# Altium PCB esp32_radio_pcb.PcbDoc
Units mil, origin at the board's own origin, x right, y up, seen from the top; angles counter-clockwise.
Board outline 5274 x 3102 mil, 2 copper layers (Top Layer, Bottom Layer); 38 components, 33 nets, 127 pads, 5 vias.
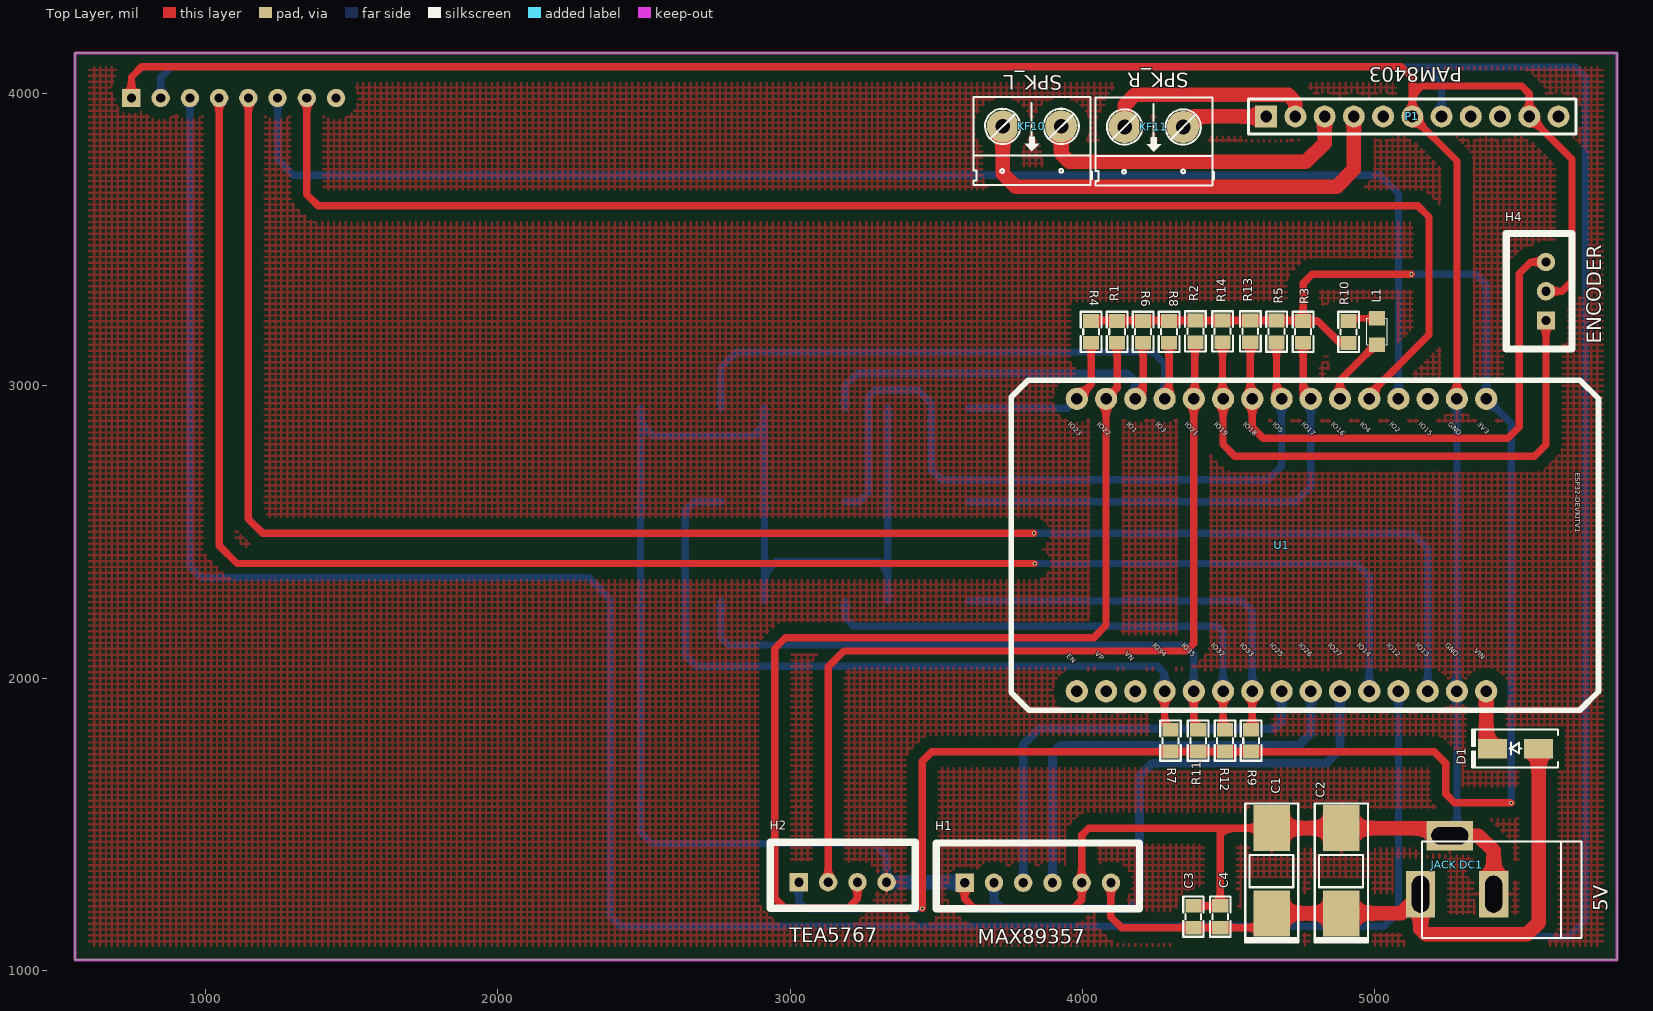
[diagram p0: Top Layer view]
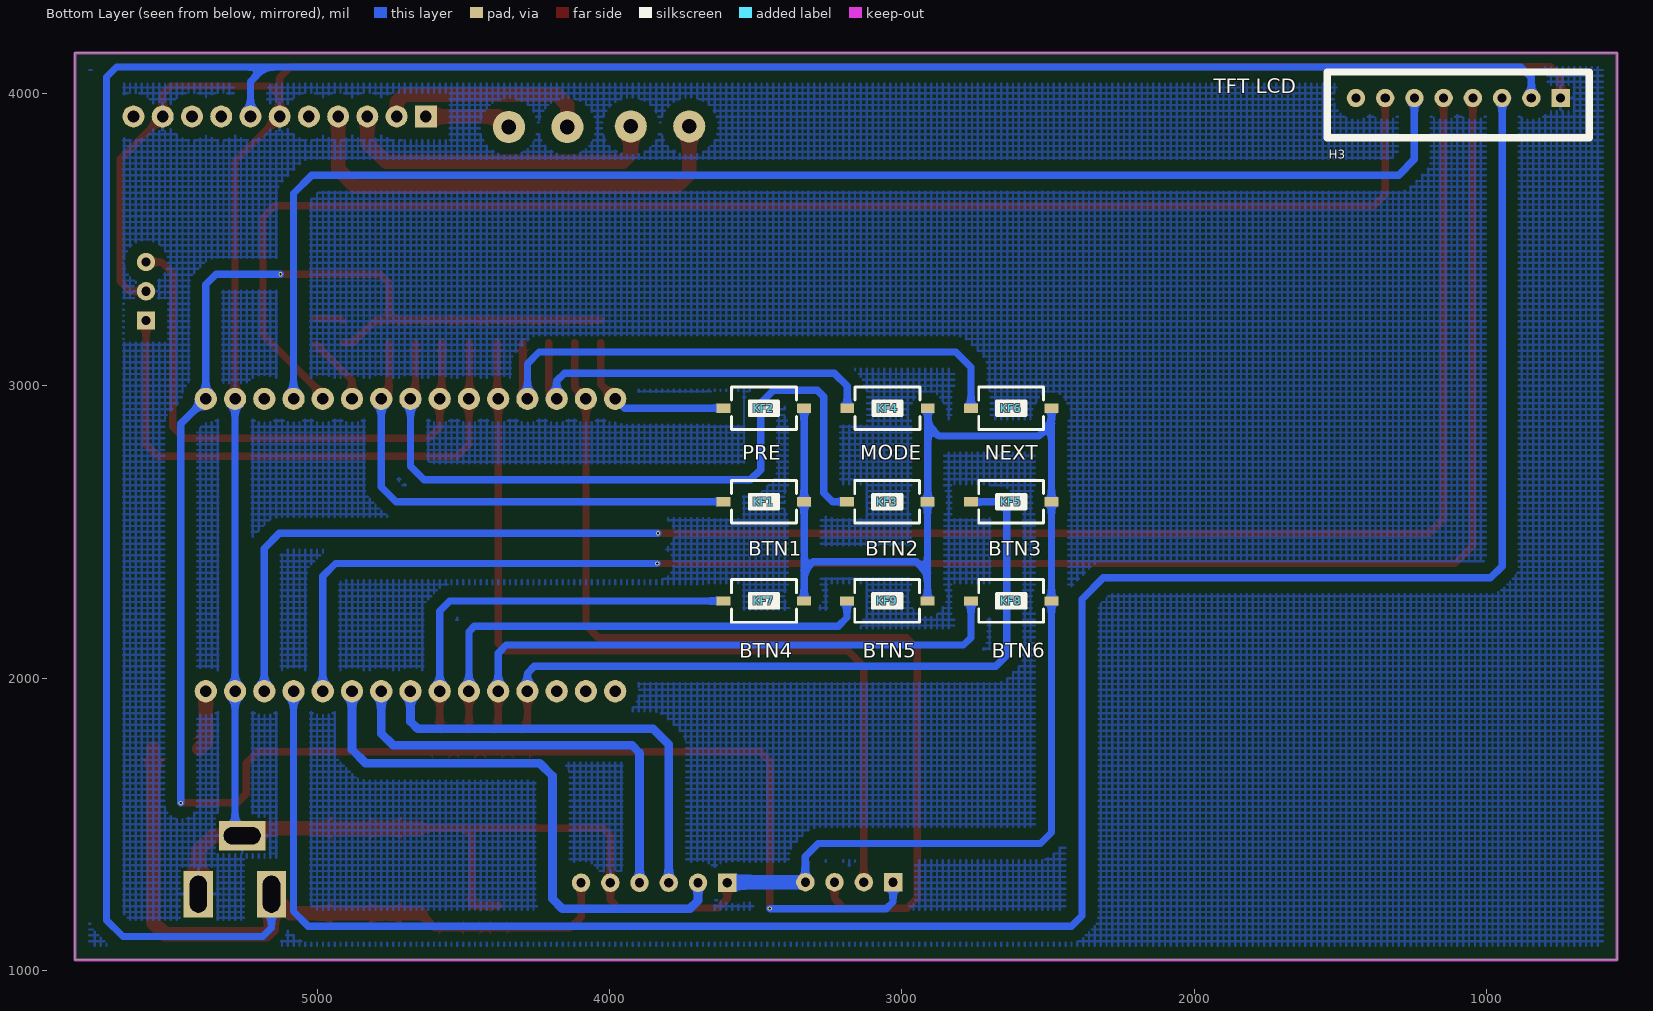
[diagram p1: Bottom Layer view, seen from below]
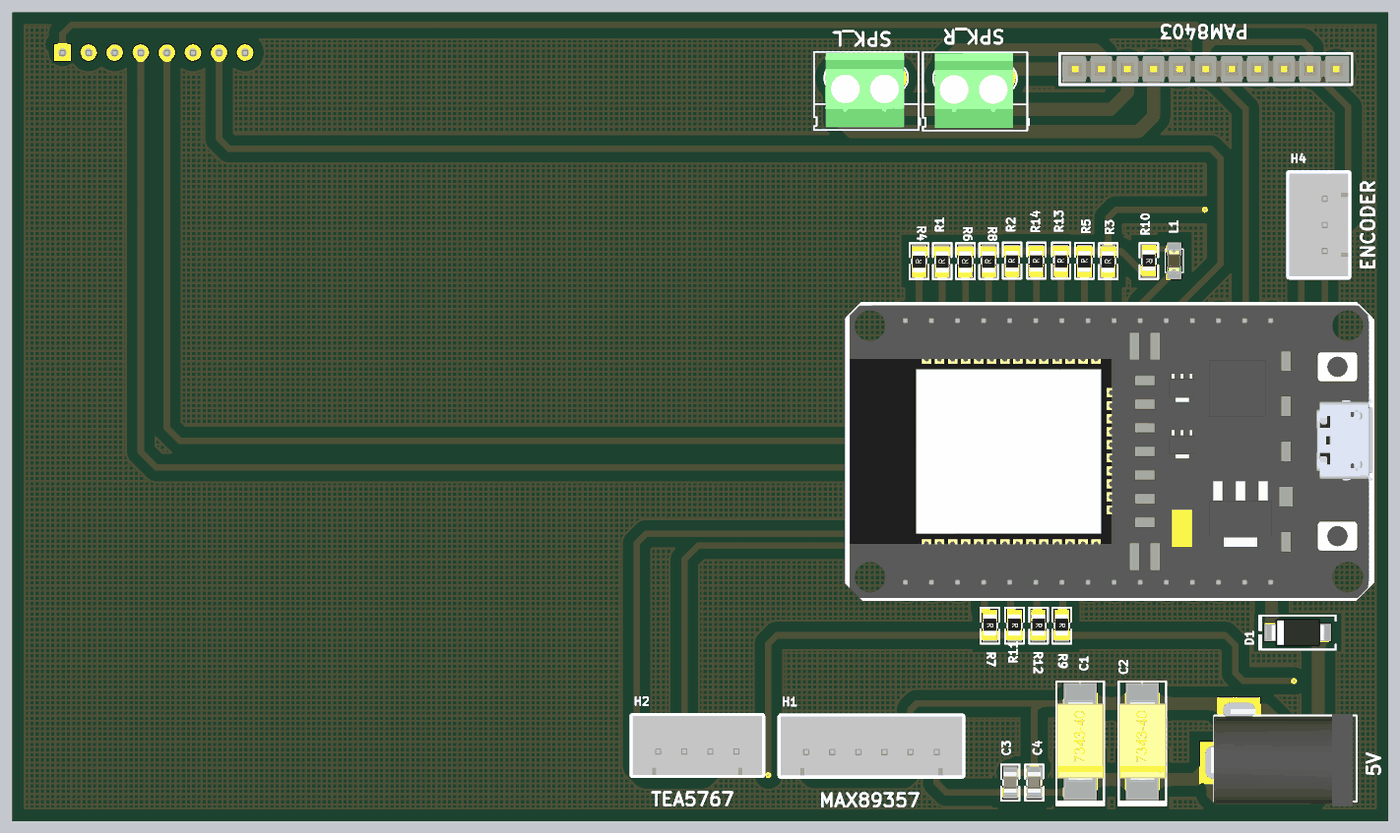
[diagram p2: 3D render of the assembled board from above, using the file's embedded part models]
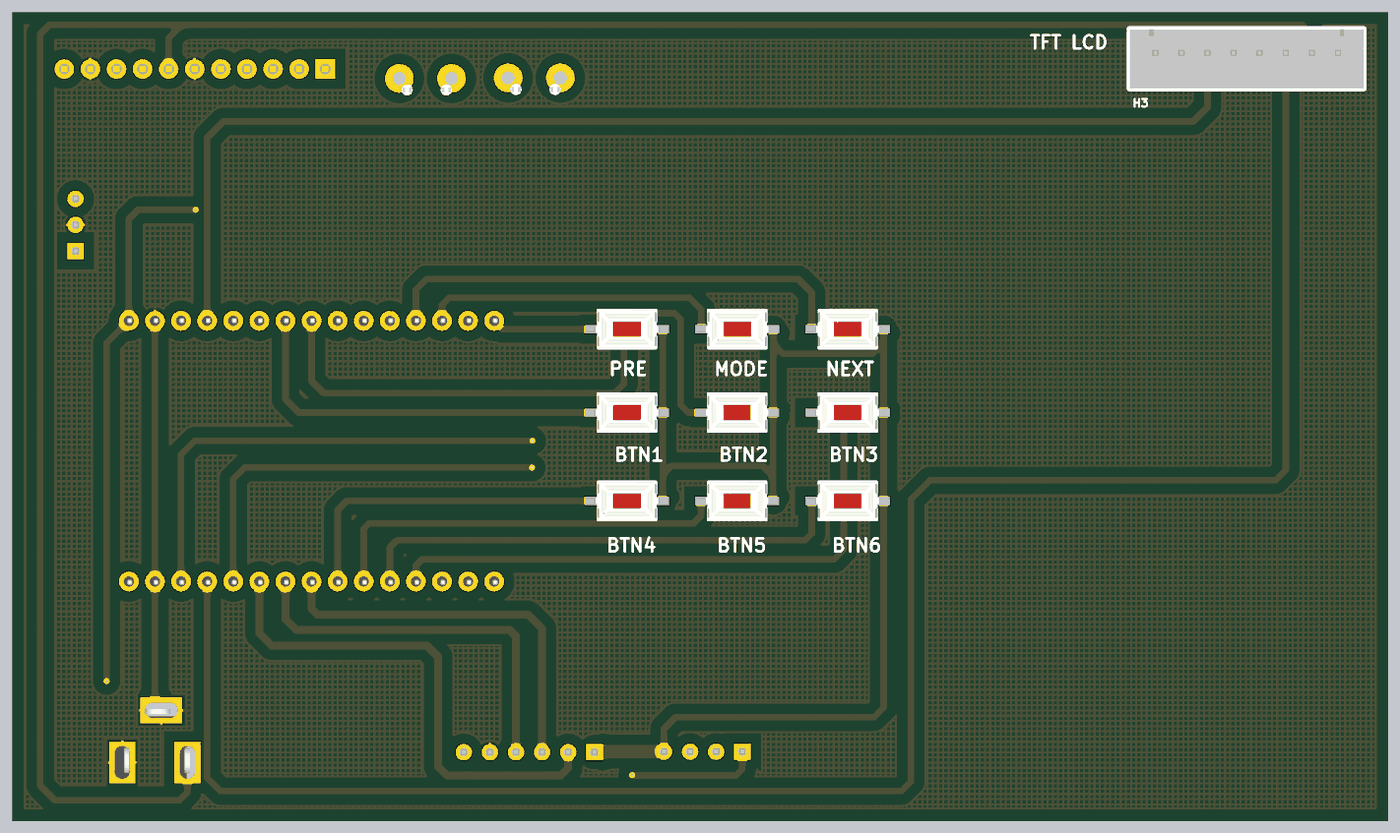
[diagram p3: 3D render of the assembled board from below, using the file's embedded part models]

## Layer stack, top to bottom
Top Solder: solder mask 0.4, Solder Resist, Dk 3.5
Top Layer: signal copper 1.4
Dielectric 1: dielectric 12.6, FR-4, Dk 4.8
Bottom Layer: signal copper 1.4
Bottom Solder: solder mask 0.4, Solder Resist, Dk 3.5

## Board outline
554,1036 5828,1036 5828,4138 554,4138

## Design rules (kind name [scope] priority, off if disabled: settings)
Clearance [All] p1: gap=40
PolygonConnect [All] p1: connectstyle=Relief reliefconductorwidth=10 reliefentries=4 polygonreliefangle="90 Angle" airgapwidth=10
RoutingVias [All] p1: holewidth=8 width=15 viastyle="Through Hole" minholewidth=8 minwidth=15 maxholewidth=8 maxwidth=15
SolderMaskExpansion [All] p1: expansion=4
Width [All] p1: maxlimit=50 minlimit=10 preferedwidth=25
30 further rules are at their usual default settings.

## Components (designator, comment, footprint, x,y, rotation, side; value= is the part's Value field where it differs from the comment)
C1 "470uF" "tu tantalum smd7343" 4647,1341 r90 top
C2 "470uF" "tu tantalum smd7343" 4885,1341 r90 top
C3 "10pF" "tu 0805" 4379,1184 r270 top
C4 "10pF" "tu 0805" 4471,1184 r270 top
D1 "M7" "DIODE SMA" 5481,1759 r180 top
H1 "Header 6P 2.54 Duc Thang" XH2.54M-6 3597,1300 r0 top
H2 "Header 4P 2.54 Duc Thang" XH2.54M-4 3030,1302 r0 top
H3 "Header 8P 2.54 Duc Thang" XH2.54M-8 747,3984 r0 bottom
H4 "Header 3P 2.54 Duc Thang" XH2.54M-3 5585,3223 r90 top
"JACK DC1" "JACK DC 5.5" "JACK DC 5.5" 5281,1361 r180 top
KF1 "CON 2 KF301" "Nut Nhan 2 Chan SMD 3x6x2.5" 3472,2603 r180 bottom
KF2 "CON 2 KF301" "Nut Nhan 2 Chan SMD 3x6x2.5" 3472.02,2923 r180 bottom
KF3 "CON 2 KF301" "Nut Nhan 2 Chan SMD 3x6x2.5" 3050,2603 r180 bottom
KF4 "CON 2 KF301" "Nut Nhan 2 Chan SMD 3x6x2.5" 3049.01,2923 r180 bottom
KF5 "CON 2 KF301" "Nut Nhan 2 Chan SMD 3x6x2.5" 2626,2603 r180 bottom
KF6 "CON 2 KF301" "Nut Nhan 2 Chan SMD 3x6x2.5" 2626,2923 r180 bottom
KF7 "CON 2 KF301" "Nut Nhan 2 Chan SMD 3x6x2.5" 3472,2264 r180 bottom
KF8 "CON 2 KF301" "Nut Nhan 2 Chan SMD 3x6x2.5" 2626,2264 r180 bottom
KF9 "CON 2 KF301" "Nut Nhan 2 Chan SMD 3x6x2.5" 3050,2264 r180 bottom
KF10 "CON 2 KF301" "Con 2 KF301 5.08" 3927,3887 r180 top
KF11 "CON 2 KF301" "Con 2 KF301 5.08" 4344.01,3885 r180 top
L1 "LED 0805" LED-0805-Red 5006.95,3140.17 r90 top
P1 "Header 11" "Header 11" 4628,3921 r0 top
R1 "10K" "tro smd 0805" 4115.88,3184 r90 top
R2 "10K" "tro smd 0805" 4383.54,3186 r90 top
R3 "10k" "tro smd 0805" 4752,3184 r90 top
R4 "10k" "tro smd 0805" 4027,3184 r90 top
R5 "10k" "tro smd 0805" 4661,3185 r90 top
R6 "10k" "tro smd 0805" 4204.77,3184 r90 top
R7 "10k" "tro smd 0805" 4303.39,1786 r270 top
R8 "10k" "tro smd 0805" 4293.65,3184 r90 top
R9 "10k" "tro smd 0805" 4579,1786 r270 top
R10 "10k" "tro smd 0805" 4912.31,3184 r270 top
R11 "10k" "tro smd 0805" 4398,1786 r270 top
R12 "10k" "tro smd 0805" 4489.8,1786 r270 top
R13 "10k" "tro smd 0805" 4571.21,3186 r90 top
R14 "10k" "tro smd 0805" 4476.51,3186 r90 top
U1 "ESP32-DEVKITC-32D" MODULE_ESP32-DEVKITV1 4790,2455 r270 top

## Footprints (in the part's own frame and the unit in brackets; to place one, negate y for a bottom-side part, rotate by r counter-clockwise, add the part's x,y. Pads: shape width x height; smd on the part's side, far side on the other; paste and mask are expansions set on the pad)
"Con 2 KF301 5.08" [mil]
  round 110 hole 50: 1(0,0) 2(200,0)
  silkscreen extent -106,-100 300,200, body extent -45,-97 255,190, height 335
"DIODE SMA" [mm] "SMA"
  rect 2.5x1.7 smd: 1(-2,0) 2(2,0)
  silkscreen extent -3.68,-1.65 3.75,1.65, body extent -2.6,-1.37 2.6,1.37, height 2.4
"Header 11" [mil] "Connector; Header; 11 Position; Solder Pad 35mil"
  rect 75x75 hole 40: 1(0,0)
  round 75 hole 40: 2(100,0) 3(200,0) 4(300,0) 5(400,0) 6(500,0) 7(600,0) 8(700,0) 9(800,0) 10(900,0) 11(1000,0)
  silkscreen extent -60,-60 1060,60, body extent -50,-50 1050,50, height 330
"JACK DC 5.5" [mil] "Jac DC input"
  rect 100x160 hole 59.06 slot 125.98 at 90 deg: 1(125,100) 2(-125,100)
  rect 160x100 hole 59.06 slot 125.98 at 0 deg: 3(25,-100)
  silkscreen extent -425,-80 120,250, body extent -410,-105 134,269, height 434
LED-0805-Red [mil]
  rect 50x55 smd: 1(0,0) 2(90,0)
  silkscreen extent 0,-35 90,35, body extent 5,-25 85,25, height 43
MODULE_ESP32-DEVKITV1 [mil]
  round 76 / inner round 60 / far side round 76 hole 39.37: 1(-500,590.55) 2(-500,490.55) 3(-500,390.55) 4(-500,290.55) 5(-500,190.55) 6(-500,90.55) 7(-500,-9.45) 8(-500,-109.45) 9(-500,-209.45) 10(-500,-309.45) 11(-500,-409.45) 12(-500,-509.45) 13(-500,-609.45) 14(-500,-709.45) 15(-500,-809.45) 16(500,-809.45) 17(500,-709.45) 18(500,-609.45) 19(500,-509.45) 20(500,-409.45) 21(500,-309.45) 22(500,-209.45) 23(500,-109.45) 24(500,-9.45) 25(500,90.55) 26(500,190.55) 27(500,290.55) 28(500,390.55) 29(500,490.55) 30(500,590.55)
  silkscreen extent -563,-1034 565,974, body extent -560,-1027 562,978, height 283
"Nut Nhan 2 Chan SMD 3x6x2.5" [mm] "Switch SMD type"
  rect 1.2x0.8 smd: 1(-3.5,0) 2(3.5,0)
  silkscreen extent -2.82,-1.85 2.82,1.85, body extent -3.05,-1.85 3.05,1.85, height 2.5
"tro smd 0805" [mm]
  rect 1.2x1.4 smd: 1(-0.946,-0.061) 2(0.954,-0.061)
  silkscreen extent -1.75,-0.97 1.75,0.84, body extent -1.56,-0.76 1.44,0.64, height 0.53
"tu 0805" [mm] "Compoment SMD 80x50mil"
  rect 1.2x1.4 smd: 1(-0.946,-0.003) 2(0.954,-0.003)
  silkscreen extent -1.75,-0.89 1.75,0.89, body extent -1.01,-0.64 1.01,0.63, height 0.61
"tu tantalum smd7343" [mm]
  rect 4x3.2 smd: 1(-3.7,0) 2(3.7,0)
  silkscreen extent -6.23,-2.31 5.85,2.31, body extent -3.75,-2.33 3.85,2.27, height 3.99
XH2.54M-3 [mm]
  rect 1.6x1.6 hole 0.8: 1(0,0)
  round 1.6 hole 0.8: 2(2.54,0) 3(5.08,0)
  silkscreen extent -2.48,-2.26 7.56,3.46, body extent -2.48,-2.26 7.56,3.48, height 6.91
XH2.54M-4 [mm]
  rect 1.6x1.6 hole 0.8: 1(0,0)
  round 1.6 hole 0.8: 2(2.54,0) 3(5.08,0) 4(7.62,0)
  silkscreen extent -2.48,-2.26 10.1,3.46, body extent -2.48,-2.26 10.1,3.48, height 6.91
XH2.54M-6 [mm]
  rect 1.6x1.6 hole 0.8: 1(0,0)
  round 1.6 hole 0.8: 2(2.54,0) 3(5.08,0) 4(7.62,0) 5(10.16,0) 6(12.7,0)
  silkscreen extent -2.48,-2.26 15.18,3.46, body extent -2.48,-2.26 15.18,3.48, height 6.91
XH2.54M-8 [mm]
  rect 1.6x1.6 hole 0.8: 1(0,0)
  round 1.6 hole 0.8: 2(2.54,0) 3(5.08,0) 4(7.62,0) 5(10.16,0) 6(12.7,0) 7(15.24,0) 8(17.78,0)
  silkscreen extent -2.48,-2.26 20.26,3.46, body extent -2.48,-2.26 20.26,3.48, height 6.91

## Part data
C1 C2: library part "Tu tantalum 470uF 10V SMD7343", "Dán"
C3 C4: library part "Tu 0805 10pF 50V 10%", "Dán"
D1: library part "Diode M7 ( 4007 )", "Dán"
H1 H2 H3 H4 KF1 KF2 KF3 KF4 KF5 KF6 KF7 KF8 KF9 KF10 KF11: "C?m"
L1: library part "LED 0805 Do", "Dán"
P1: "Header, 11-Pin"
R1 R2 R3 R4 R5 R6 R7 R8 R9 R10 R11 R12 R13 R14: library part "Tro 0805 1% 1k", "Dán"
U1: "Eval Board For Esp-Wroom-32"

## Via types
v1: diameter 15, hole 8, Top Layer to Bottom Layer, 5 vias

## Nets (pads, with @x,y where several pads share a name; then routed paths per layer and width w, separated by ;. In a path a pad name is that pad's centre, name@x,y a point inside that pad or via, vN(x,y) a via of type N, cw(c..) or ccw(c..) an arc to the next point about the centre after c; other vN are vias at no path point)
+3V3: H2.1 R1.2 R2.2 R3.2 R4.2 R5.2 R6.2 R7.2 R8.2 R9.2 R10.2 R11.2 R12.2 R13.2 R14.2 U1.1 | length 6668.4
  Top Layer w25: v1(3452,1212) 3452,1716 3484.43,1748.43 R7.2 R11.2 R12.2 R9.2 5202.57,1748.43 5242,1709 5242,1604 5272,1574 5465,1574 v1(5466,1573) ; R4.2@4030,3224 4030.43,3223.57 R2.2 R14.2 R13.2 4752.39,3223.57 R3.2 ; R10.2 4879.57,3146.43 4804.43,3221.57 R3.2 ; v1(5125,3381) 4785,3381 4754.39,3350.39 R3.2
  Bottom Layer w25: H2.1 3030,1234 3053,1211 3451,1211 v1(3452,1212) ; v1(5125,3381) 5346,3381 5380.55,3346.45 U1.1 5466,2869.55 v1(5466,1573)
+5V: "JACK DC1.1" C1.1 C2.1 C3.2 C4.2 D1.1 H1.6 H3.2 P1.7 | length 11140.9
  Top Layer w25: H1.6 4097,1183 4133.57,1146.43 C3.2 C4.2 4598.09,1146.43 C1.1
  Top Layer w50: C1.1 C2.1 5090.33,1195.33 5156,1261 5156,1142 5174,1124 5520,1124 5559.74,1163.74 D1.1
  Bottom Layer w25: H3.2 847,4054 883,4090 5178,4090 ; 5156,1261 5156,1146 5186,1116 5664,1116 5720,1172 5720,4056 5686,4090 5178,4090 ; P1.7 5228,4040 5178,4090
BCK: H1.2 U1.25 | length 1927.2
  Bottom Layer w30: H1.2 3697,1239 3725,1211 4161,1211 4195,1245 4195,1665 4239,1709 4834,1709 4880.55,1755.55 U1.25
BTN_1: KF1.1 R3.1 U1.7 | length 1695.8
  Top Layer w25: R3.1 4754.39,2981.16 U1.7
  Bottom Layer w25: KF1.1 4730,2603 4780.55,2653.55 U1.7
BTN_2: KF3.1 R5.1 U1.8 | length 2552.6
  Top Layer w25: R5.1 4663.39,2972.16 U1.8
  Bottom Layer w25: KF3.1 3237,2603 3267,2633 3267,2962 3289,2984 3439,2984 3483,2940 3483,2713 3518,2678 4634,2678 4680.55,2724.55 U1.8
BTN_3: KF5.1 R7.1 U1.19 | length 2497
  Top Layer w25: U1.19 4280.55,1843.68 R7.1
  Bottom Layer w25: KF5.1 2671,2603 2641,2573 2641,2078 2679,2040 4257,2040 4280.55,2016.45 U1.19
BTN_4: KF7.1 R9.1 U1.22 | length 1392.9
  Top Layer w25: R9.1 4580.55,1827.17 U1.22
  Bottom Layer w25: KF7.1 4546,2264 4580.55,2229.45 U1.22
BTN_5: KF9.1 R12.1 U1.21 | length 1707.8
  Top Layer w25: U1.21 4480.55,1830.08 R12.1
  Bottom Layer w25: KF9.1 3187.8,2207.2 3218,2177 4462,2177 4480.55,2158.45 U1.21
BTN_6: KF8.1 R11.1 U1.20 | length 2032.9
  Top Layer w25: U1.20 4380.55,1838.28 R11.1
  Bottom Layer w25: KF8.1 2763.8,2138.2 2789,2113 4353,2113 4380.55,2085.45 U1.20
BTN_MODE: KF4.1 R6.1 U1.13 | length 1363.1
  Top Layer w25: U1.13 4207.16,2981.61 R6.1
  Bottom Layer w25: KF4.1 3186.81,2998.81 3231,3043 4154,3043 4180.55,3016.45 U1.13
BTN_NEXT: KF6.1 R8.1 U1.12 | length 2013.2
  Top Layer w25: U1.12 4296.05,2970.49 R8.1
  Bottom Layer w25: KF6.1 2763.8,3062.8 2816,3115 4241,3115 4280.55,3075.45 U1.12
BTN_PRE: KF2.1 R4.1 U1.15 | length 596
  Top Layer w25: U1.15 4029.39,3003.84 R4.1
  Bottom Layer w25: KF2.1 3948.55,2923 U1.15
DIN: H1.3 U1.23 | length 1492.5
  Bottom Layer w30: H1.3 3797,1773 3851,1827 4656,1827 4680.55,1851.55 U1.23
GND: "JACK DC1.2" "JACK DC1.3" C1.2 C2.2 C3.1 C4.1 H1.1 H1.5 H2.4 H3.1 H4.2 KF1.2 KF2.2 KF3.2 KF4.2 KF5.2 KF6.2 KF7.2 KF8.2 KF9.2 P1.6 P1.10 U1.2 U1.29 | length 15952.9
  Top Layer w25: H3.1 747,4056 782,4091 5091,4091 5128,4054 5128,3994 ; H1.1 3597,1245 3628,1214 3969,1214 3997,1242 H1.5 3997,1463 4020.67,1486.67 4491.67,1486.67 ; C3.1 C4.1 4470.87,1465.87 4491.67,1486.67 ; C1.2 4491.67,1486.67 ; U1.2 5280.55,3768.45 P1.6 5128,3994 ; H4.2 5640,3323 5674,3357 5674,3775 P1.10 5528,3999 5502,4025 5159,4025 5128,3994
  Top Layer w50: C1.2 C2.2 5230.33,1486.67 5256,1461 5354,1461 5406,1409 5406,1261
  Bottom Layer w25: KF6.2 2488.2,2872 ; KF4.2 2911.21,2866 ; KF9.2 2912.2,2359 ; H2.4 3330,1390 3286,1434 2526,1434 2488.2,1471.8 KF8.2 KF5.2 2488.2,2872 ; KF7.2 3334.2,2367 ; KF2.2 KF1.2 3334.2,2367 ; 5256,1461 5280.55,1485.55 U1.29 U1.2 ; 2488.2,2872 2532.2,2828 2873.21,2828 2911.21,2866 ; 2911.21,2866 2911.21,2603.99 KF3.2 2912.2,2359 ; 2912.2,2359 2951.2,2398 3303.2,2398 3334.2,2367
  Bottom Layer w50: H2.4 3595,1302 H1.1
LCK: H1.4 U1.24 | length 1499.6
  Bottom Layer w30: H1.4 3897,1744 3923,1770 4740,1770 4780.55,1810.55 U1.24
LED1: L1.1 U1.6 | length 240.3
  Top Layer w25: U1.6 4880.55,3018.55 5002.17,3140.17 L1.1
NetD1_2: D1.2 U1.30 | length 205
  Top Layer w50: U1.30 5380.55,1780.71 D1.2
NetL1_2: L1.2 R10.1 | length 100.7
  Top Layer w20: R10.1 4918.85,3230.17 L1.2
SCL: H2.3 R1.1 U1.14 | length 3369.1
  Top Layer w25: H2.3 3230,1245 3198,1213 2982,1213 2947,1248 2947,2101 2984,2138 4038,2138 4080.55,2180.55 U1.14 4118.28,2992.73 R1.1
SDA: H2.2 R2.1 U1.11 | length 3052.2
  Top Layer w25: H2.2 3130,2039 3184,2093 4355,2093 4380.55,2118.55 U1.11 4384.2,2958.65 R2.1@4384.2,3148.77
SPK_IN_L: P1.9
SPK_IN_R: P1.11
SPK_OUT_L1: KF10.1 P1.3 | length 1123.7
  Top Layer w50: KF10.1 3927,3793 3954,3766 4764,3766 4828,3830 P1.3
SPK_OUT_L2: KF10.2 P1.4 | length 1586.7
  Top Layer w50: KF10.2 3727,3725 3771,3681 4869,3681 4928,3740 P1.4
SPK_OUT_R1: KF11.1 P1.1 | length 298.9
  Top Layer w50: KF11.1 4380.01,3921 P1.1
SPK_OUT_R2: KF11.2 P1.2 | length 732.8
  Top Layer w50: KF11.2 4144.01,3960.01 4179,3995 4703,3995 4728,3970 P1.2
TFT_CS: H3.7 U1.5 | length 4906.6
  Top Layer w25: H3.7 1347,3654 1386,3615 5147,3615 5185,3577 5185,3174 4980.55,2969.55 U1.5
TFT_DC: H3.6 U1.4 | length 4794.3
  Bottom Layer w25: H3.6 1247,3774 1301,3720 5018,3720 5080.55,3657.45 U1.4
TFT_MOSI: H3.4 U1.26 | length 5901.3
  Top Layer w25: H3.4 1047,2453 1108,2392 v1(3836,2392)
  Bottom Layer w25: v1(3836,2392) 4937,2392 4980.55,2348.45 U1.26
TFT_RST: H3.5 U1.28 | length 6003.6
  Top Layer w25: H3.5 1147,2544 1196,2495 v1(3834,2495)
  Bottom Layer w25: v1(3834,2495) 5129,2495 5180.55,2443.45 U1.28
TFT_SCLK: H3.3 U1.27 | length 7653.7
  Bottom Layer w25: H3.3 947,2383 987,2343 2311,2343 2384,2270 2384,1187 2420,1151 5030,1151 5080.55,1201.55 U1.27
VR_LEFT: H4.3 R13.1 U1.9 | length 1871.5
  Top Layer w25: R13.1 4573.6,2961.95 U1.9 4580.55,2857.45 4618,2820 5455,2820 5494,2859 5494,3384 5533,3423 H4.3
VR_RIGHT: H4.1 R14.1 U1.10 | length 1912.4
  Top Layer w25: R14.1 4478.9,2956.65 U1.10 4480.55,2799.45 4521,2759 5546,2759 5585,2798 H4.1
pads on no net: H3.8 P1.5 P1.8 U1.3 U1.16 U1.17 U1.18

## Polygon pours and split planes (outlines as drawn)
GND on Top Layer "Top Overlay-No Net" (hatched 90Degree grid 20 track 8, pour order 0): 554,4138 561,4131 5828,4131 5828,1036 554,1036
GND on Bottom Layer "Top Overlay-No Net" (hatched 90Degree grid 20 track 8, pour order 2): 554,4138 5828,4138 5828,1036 554,1036

## Keep-outs
Keep-Out Layer:
  the board outline again, w10

## Silkscreen, mask and mechanical layers (free items; w line width, h text height)
Top Overlay:
  text "PAM8403" at 5298,4090 h50 r180
  text "SPK_R" at 4364,4070 h50 r180
  text "SPK_L" at 3931,4062 h50 r180
  text "ENCODER" at 5774,3143 h50 r90
  text "5V" at 5796,1202 h50 r90
  text "TEA5767" at 2997,1096 h50
  text "MAX89357" at 3641,1092 h50
Bottom Overlay:
  text "TFT LCD" at 1934,4000 h50
  text "NEXT" at 2716,2747 h50
  text "MODE" at 3143,2747 h50
  text "PRE" at 3546,2747 h50
  text "BTN3" at 2704,2418 h50
  text "BTN2" at 3126,2418 h50
  text "BTN1" at 3526,2418 h50
  text "BTN6" at 2692,2070 h50
  text "BTN5" at 3133,2070 h50
  text "BTN4" at 3556,2070 h50

## Text inside footprints (layer, text, board x,y; h text height)
U1: Top Overlay "EN" at 3940,2067.2 h30 r315; Top Overlay "VP" at 4037.25,2077.05 h30 r315; Top Overlay "VN" at 4137.25,2077.05 h30 r315; Top Overlay "IO34" at 4232.91,2105.4 h30 r315; Top Overlay "IO35" at 4332.91,2105.4 h30 r315; Top Overlay "IO32" at 4432.91,2105.4 h30 r315; Top Overlay "IO33" at 4532.91,2105.4 h30 r315; Top Overlay "IO25" at 4632.91,2105.4 h30 r315; Top Overlay "IO26" at 4732.91,2105.4 h30 r315; Top Overlay "IO27" at 4832.91,2105.4 h30 r315; Top Overlay "IO14" at 4932.91,2105.4 h30 r315; Top Overlay "IO12" at 5032.91,2105.4 h30 r315; Top Overlay "IO13" at 5132.91,2105.4 h30 r315; Top Overlay "GND" at 5232.91,2105.4 h30 r315; Top Overlay "VIN" at 5333.31,2086.1 h30 r315; Top Overlay "IO23" at 3943.55,2861.69 h30 r315; Top Overlay "IO22" at 4043.55,2861.69 h30 r315; Top Overlay "IO1" at 4143.55,2861.69 h30 r315; Top Overlay "IO3" at 4243.55,2861.69 h30 r315; Top Overlay "IO21" at 4343.55,2861.69 h30 r315; Top Overlay "IO19" at 4443.55,2861.69 h30 r315; Top Overlay "IO18" at 4543.55,2861.69 h30 r315; Top Overlay "IO5" at 4643.55,2861.69 h30 r315; Top Overlay "IO17" at 4743.55,2861.69 h30 r315; Top Overlay "IO16" at 4843.55,2861.69 h30 r315; Top Overlay "IO4" at 4943.55,2861.69 h30 r315; Top Overlay "IO2" at 5043.55,2861.69 h30 r315; Top Overlay "IO15" at 5143.55,2861.69 h30 r315; Top Overlay "GND" at 5243.55,2861.69 h30 r315; Top Overlay "3V3" at 5343.55,2861.69 h30 r315; Top Overlay "ESP32-DEVKITV1" at 5678.58,2702.64 h30 r270